# Altium PCB PCB.PcbDoc
Units mm, origin at the board's own origin, x right, y up, seen from the top; angles counter-clockwise.
Board outline 53.85 x 86.11 mm, 2 copper layers (Top Layer, Bottom Layer); 72 components, 42 nets, 242 pads, 64 vias.
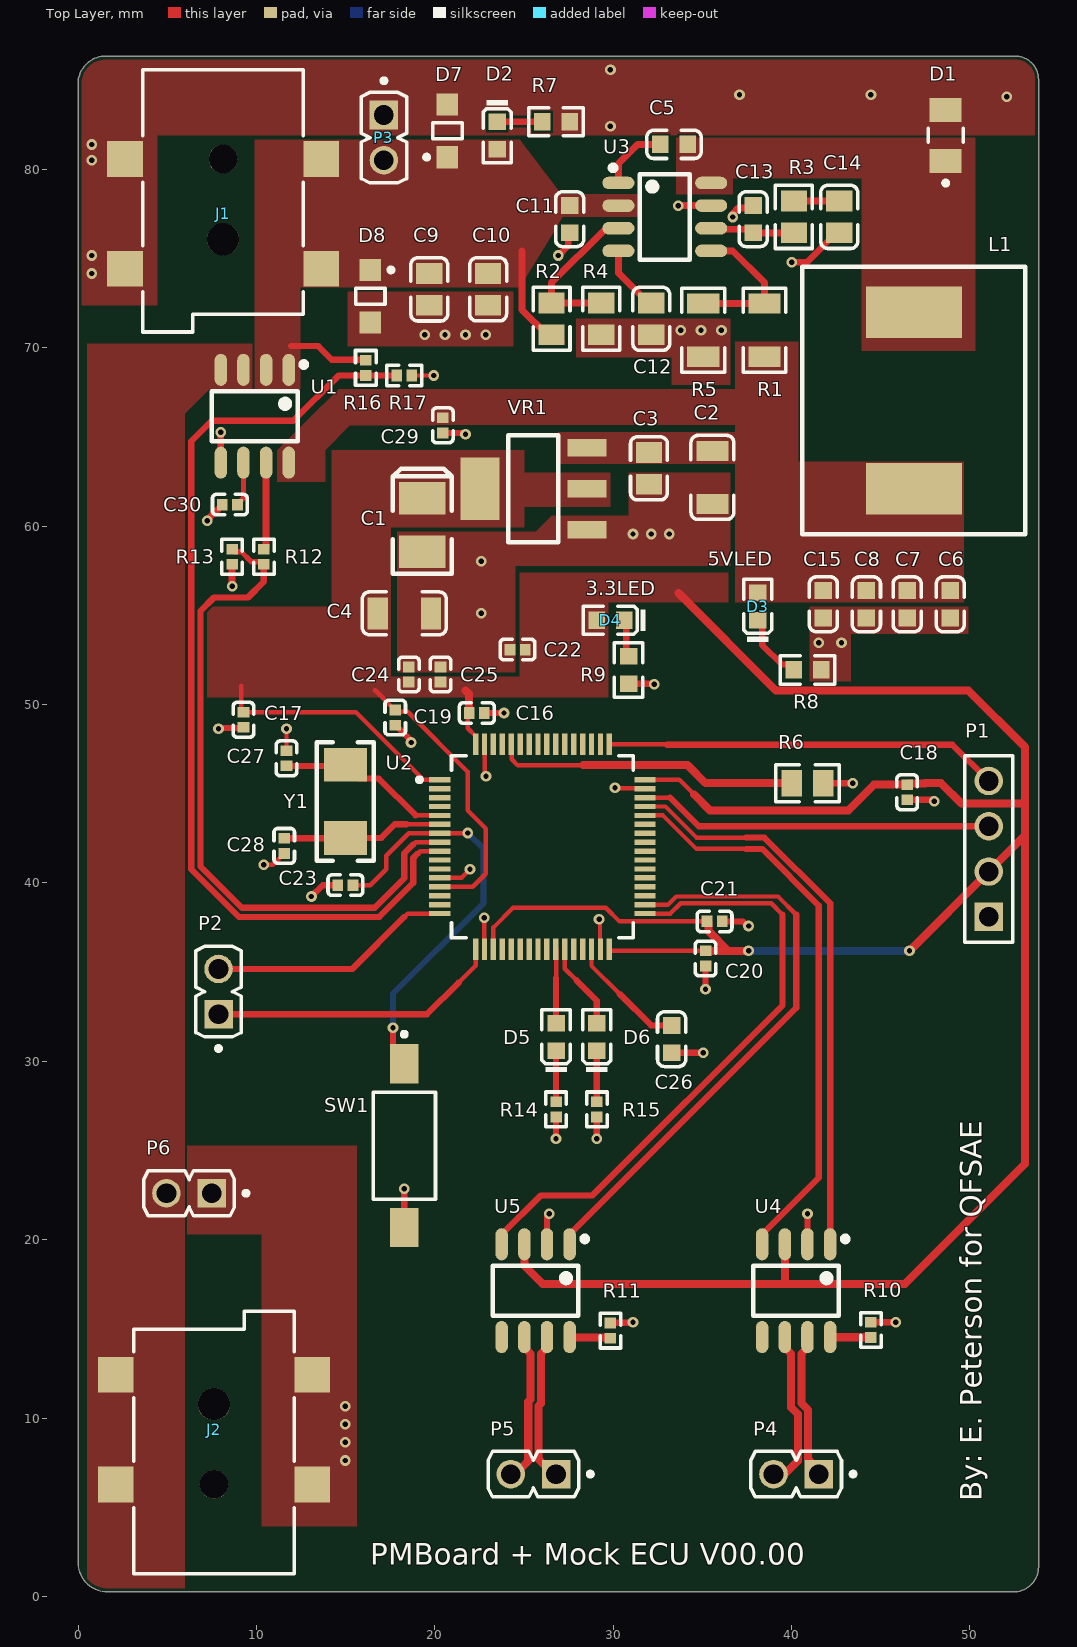
[diagram p0: Top Layer view]
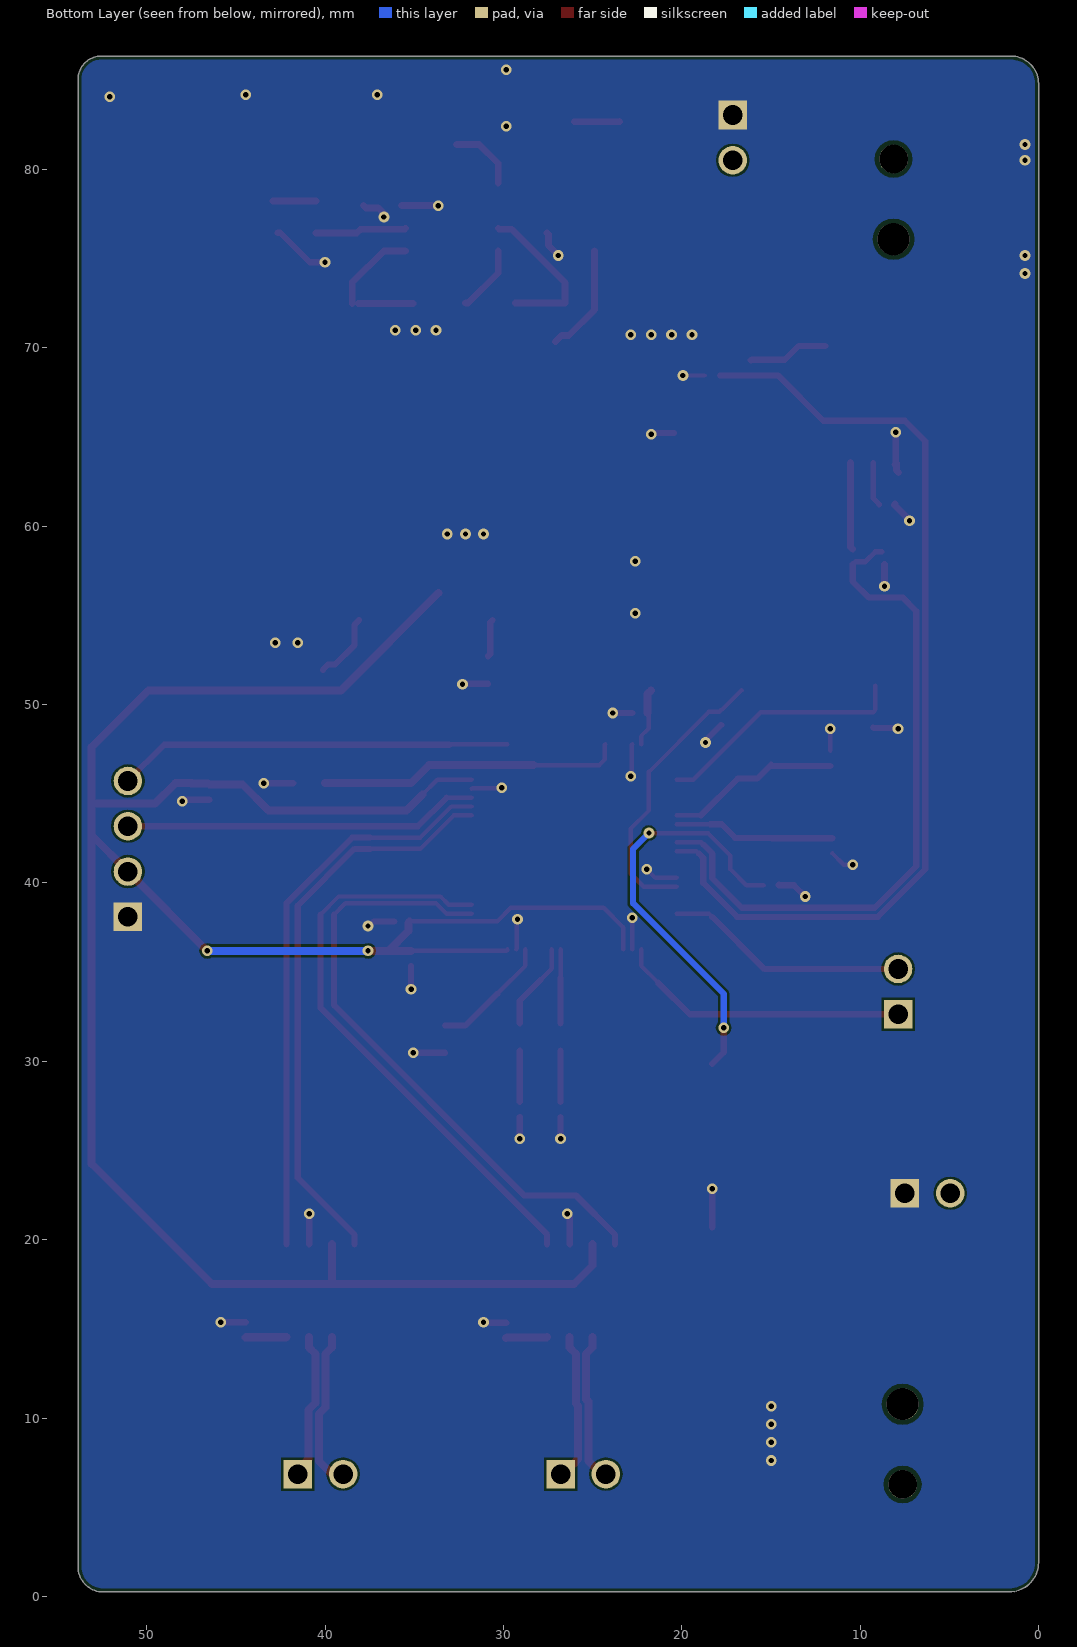
[diagram p1: Bottom Layer view, seen from below]
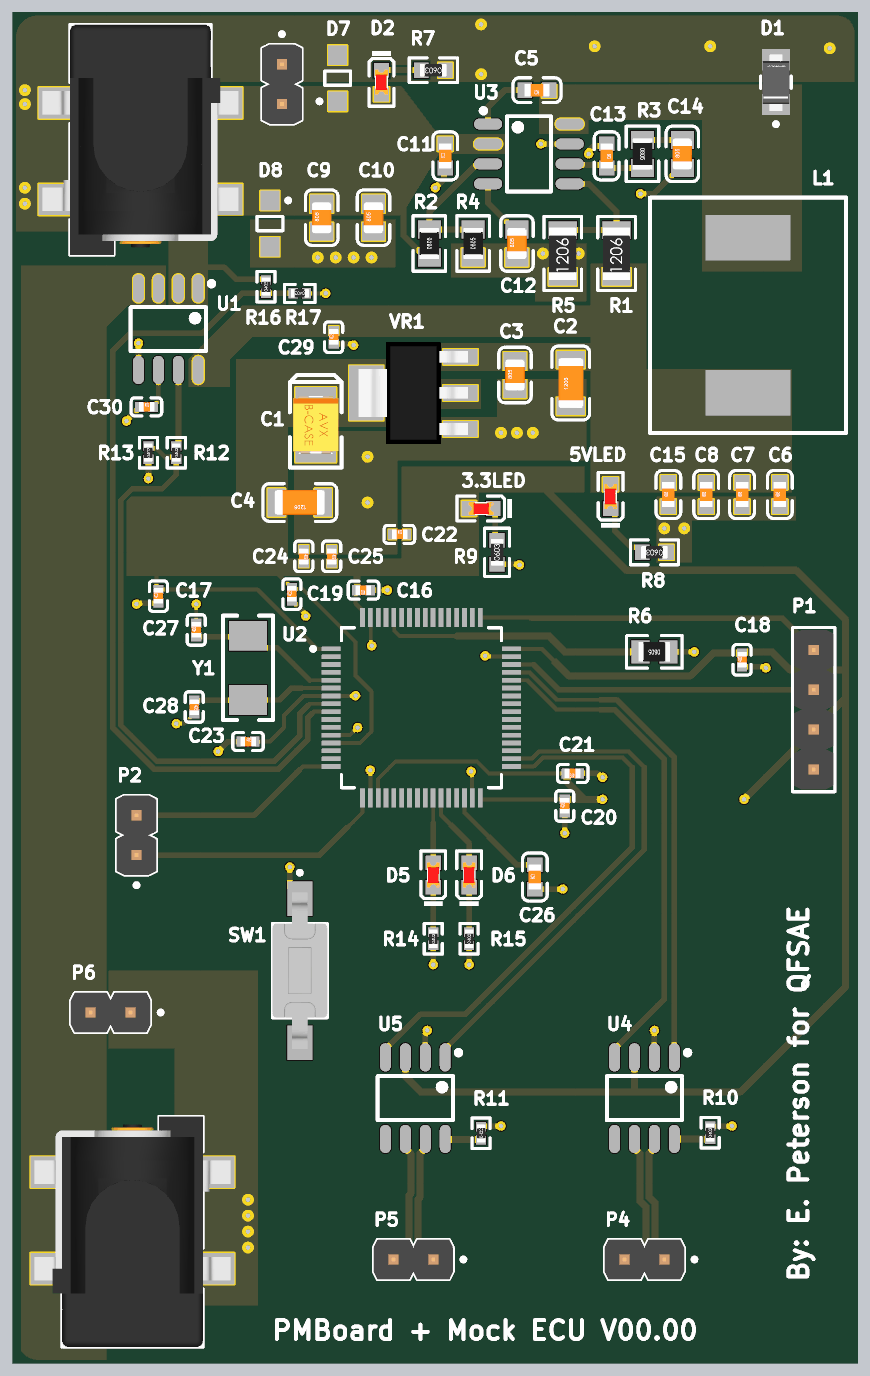
[diagram p2: 3D render of the assembled board from above, using the file's embedded part models]

## Layer stack, top to bottom
Top Solder: solder mask 0.0102, Solder Resist, Dk 3.5
Top Layer: signal copper 0.0356
Dielectric 1: dielectric 0.32, FR-4, Dk 4.8
Bottom Layer: signal copper 0.0356
Bottom Solder: solder mask 0.0102, Solder Resist, Dk 3.5

## Board outline
1.646,0.254 52.446,0.254 ccw(c52.446,1.656) 53.848,1.656 53.848,85.052 ccw(c52.54,85.052) 52.54,86.36 1.552,86.36 ccw(c1.552,84.808) 0,84.808 0,1.9 ccw(c1.646,1.9)

## Design rules (kind name [scope] priority, off if disabled: settings)
BoardOutlineClearance [All] p1: gap=0.2 ignorepadtopadclearanceinfootprint=FALSE
Clearance [All] p1: gap=0.127 ignorepadtopadclearanceinfootprint=FALSE except(0.25: Arc-Hole Track-Hole SMDPad-Hole THPad-Hole Via-Hole Fill-Hole Poly-Hole Region-Hole Text-Hole)
ComponentClearance [All] p1: gap=0.127 collisioncheckmode=3 verticalgap=0.127 showdistances=TRUE
DiffPairsRouting [All] p1: maxlimit=0.254 minlimit=0.127 mostfreqgap=0.127 toplayer_minwidth=0.127 toplayer_maxwidth=25.4 toplayer_prefwidth=0.127 bottomlayer_minwidth=0.127 bottomlayer_maxwidth=25.4 bottomlayer_prefwidth=0.127 maxuncoupledlength=12.7
Height [All] p1: minheight=0 maxheight=1816.048 prefheight=12.7
HoleSize [All] p1: absolutevalues=TRUE maxlimit=6.3 minlimit=0.3 maxpercent=80.000 minpercent=20.000
HoleToHoleClearance [All] p1: gap=0.25 allowstackedmicrovias=FALSE
MinimumAnnularRing [All] p1: minimumring=0.076
MinimumSolderMaskSliver [All] p1: minsoldermaskwidth=0
PlaneClearance [All] p1: clearance=0.127
PlaneConnect PlaneConnectPowerPads [InPadClass('PowerPads')] p1: planeconnectstyle=Direct reliefexpansion=0.508 reliefentries=4 reliefconductorwidth=0.254 reliefairgap=0.254
PlaneConnect [All] p2: pad.planeconnectstyle=Relief pad.reliefexpansion=0.3 pad.reliefentries=4 pad.reliefconductorwidth=0.127 pad.reliefairgap=0.127 via.planeconnectstyle=Direct via.reliefexpansion=0.3 via.reliefentries=4 via.reliefconductorwidth=0.127 via.reliefairgap=0.127
PolygonConnect PolygonConnectPowerPads [All vs InNet('GND') or InNet('VCC12V') or InNet('VCC12VOUT') or InNet('PH') or InNet('VCC5VSW') or InNet('VCC3V3')] p1: connectstyle=Direct reliefconductorwidth=0.254 reliefentries=4 polygonreliefangle="90 Angle" airgapwidth=0.254
PolygonConnect [All] p2: thpad.connectstyle=Relief thpad.reliefconductorwidth=0.127 thpad.reliefentries=4 thpad.polygonreliefangle="90 Angle" thpad.airgapwidth=0.127 smdpad.connectstyle=Relief smdpad.reliefconductorwidth=0.127 smdpad.reliefentries=4 smdpad.polygonreliefangle="90 Angle" smdpad.airgapwidth=0.127 via.connectstyle=Direct via.reliefconductorwidth=0.127 via.reliefentries=4 via.polygonreliefangle="90 Angle" via.airgapwidth=0.127
RoutingVias [All] p1: holewidth=0.3 width=0.6 viastyle="Through Hole" minholewidth=0.3 minwidth=0.6 maxholewidth=0.6 maxwidth=6.6
SilkToSilkClearance [All] p1: silktosilkclearance=0
SilkToSolderMaskClearance [IsPad] p1: minsilkscreentomaskgap=0.127 clearancetoexposedcopper=TRUE
SolderMaskExpansion [All] p1: expansion=0.075 istentingtop=FALSE
Width [All] p1: maxlimit=25.4 minlimit=0.127 preferedwidth=0.127 minimp=50.000000 maximp=50.000000 favimp=50.000000
20 further rules are at their usual default settings.

## Classes and differential pairs
component class Power: D2 D3 D4 D7 D8 J1 P3 R7 R8 R9 R16 R17
component class MCU: C16 C17 C18 C19 C20 C21 C22 C23 C24 C25 C26 C27 C28 D5 D6 P1 P2 R6 R14 R15 SW1 U2 Y1
component class LDO: C1 C2 C3 C4 VR1
component class "Current Monitor": C29 C30 J2 P6 R12 R13 U1
component class CAN: P4 P5 R10 R11 U4 U5
component class Buck: C5 C6 C7 C8 C9 C10 C11 C12 C13 C14 C15 D1 L1 R1 R2 R3 R4 R5 U3
differential pair CAN2: +CAN2_P -CAN2_N
differential pair CAN1: +CAN1_P -CAN1_N

## Components (designator, comment, footprint, x,y, rotation, side; value= is the part's Value field where it differs from the comment)
C1 "100uF" CASE-B_3528 19.304,60.071 r90 top
C2 "10uF" 1206_C 35.56,62.738 r90 top
C3 "100nF" 0805_C 32.004,63.246 r90 top
C4 "100nF" 1206_C 18.288,55.118 r180 top
C5 "100nF" 0603_C 33.409,81.407 r180 top
C6 "10uF" 0603_C 48.895,55.626 r90 top
C7 "10uF" 0603_C 46.482,55.626 r90 top
C8 "10uF" 0603_C 44.196,55.626 r90 top
C9 "10uF" 0805_C 19.685,73.279 r90 top
C10 "10uF" 0805_C 22.987,73.28 r90 top
C11 "100nF" 0603_C 27.559,77.216 r90 top
C12 "0805 8.2nF 50V" 0805_C 32.131,71.628 r90 top
C13 "10pF" 0603_C 37.846,77.216 r270 top
C14 "0805 5.6nF 50V" 0805_C 42.672,77.343 r90 top
C15 "100nF" 0603_C 41.783,55.626 r90 top
C16 "100nF" 0402_C 22.352,49.53 r180 top
C17 "100nF" 0402_C 9.271,49.149 r90 top
C18 "100nF" 0402_C 46.482,45.085 r90 top
C19 "100nF" 0402_C 17.78,49.276 r90 top
C20 "100nF" 0402_C 35.179,35.77 r90 top
C21 "100nF" 0402_C 35.687,37.846 r180 top
C22 "4.7uF" 0402_C 24.638,53.086 r0 top
C23 "100nF" 0402_C 14.986,39.878 r0 top
C24 "1.0uF" 0402_C 18.542,51.689 r270 top
C25 "1.0uF" 0402_C 20.32,51.689 r270 top
C26 "2.2uF" 0603_C 33.274,31.242 r90 top
C27 "30pF" 0402_C 11.684,46.99 r90 top
C28 "30pF" 0402_C 11.557,42.081 r270 top
C29 "100nF" 0402_C 20.447,65.659 r90 top
C30 "1nF" 0402_C 8.509,61.214 r0 top
D1 "SS14FL" FP-425AD-MFG 48.641,81.915 r90 top value=60pF
D2 "0603 Green" 0603_LED_S1 23.495,81.915 r270 top
D3 "0603 Red" 0603_LED_S1 38.1,55.499 r90 top
D4 "0603 Blue" 0603_LED_S1 29.845,54.737 r180 top
D5 "0603 Blue" 0603_LED_S1 26.797,31.369 r90 top
D6 "0603 Blue" 0603_LED_S1 29.083,31.369 r90 top
D7 "SMF15AT1G" ONSC-SOD-123FL-2-498_V 20.701,82.169 r90 top
D8 "SMF15AT1G" ONSC-SOD-123FL-2-498_V 16.383,72.898 r270 top
J1 "694108106102" 694108106102 8.128,78.74 r180 top
J2 "694108106102" 694108106102 7.62,8.128 r0 top
L1 "22 uH" 470 46.863,67.056 r270 top
P1 "61300411121" 61300411121 51.054,41.91 r90 top
P2 "613 002 111 21" WE-61300211121_V 7.874,33.909 r90 top
P3 "613 002 111 21" WE-61300211121_V 17.145,81.788 r270 top
P4 "613 002 111 21" WE-61300211121_V 40.259,6.858 r180 top
P5 "613 002 111 21" WE-61300211121_V 25.527,6.858 r180 top
P6 "613 002 111 21" WE-61300211121_V 6.223,22.606 r180 top
R1 "10.2k 1%" 1206_R 38.481,70.993 r90 top
R2 "100KΩ ±1%" 0805_R 26.543,71.628 r90 top
R3 "6.49k 1%" 0805_R 40.132,77.343 r270 top
R4 "39KΩ ±1%" 0805_R 29.337,71.628 r90 top
R5 "1.96k 1%" 1206_R 35.052,70.993 r90 top
R6 "10KΩ ±1%" 0805_R 40.894,45.593 r180 top
R7 "1.8KΩ ±1%" 0603_R 26.797,82.677 r180 top
R8 "330Ω ±1%" 0603_R 40.894,51.943 r180 top
R9 "220Ω ±1%" 0603_R 30.861,51.943 r90 top
R10 "10KΩ ±1%" 0402_R#1 44.45,14.942 r90 top
R11 "10KΩ ±1%" 0402_R#1 29.845,14.903 r90 top
R12 "100KΩ ±1%" 0402_R#2 10.414,58.293 r90 top
R13 "150KΩ ±1%" 0402_R#2 8.636,58.293 r90 top
R14 "220Ω ±1%" 0402_R#1 26.797,27.305 r90 top
R15 "220Ω ±1%" 0402_R#1 29.083,27.305 r90 top
R16 "300KΩ ±1%" 0402_R#1 16.129,68.878 r90 top
R17 "100KΩ ±1%" 0402_R#1 18.288,68.453 r180 top
SW1 "FSMSM" TECO-FSMSM-2_V 18.288,25.273 r270 top
U1 "ACS712ELCTR-20A-T" SOIC-8_150mil 9.906,66.167 r180 top
U2 "STM32F446RET6" FP-LQFP64-5W-MFG 26.035,42.037 r0 top
U3 "TPS54331DR" SOIC-8_150mil 32.893,77.343 r270 top
U4 "CAN/SN65HVD230DR" SOIC-8_150mil 40.259,17.145 r180 top
U5 "CAN/SN65HVD230DR" SOIC-8_150mil 25.654,17.145 r180 top
VR1 "AMS1117-3.3" SOT-223 25.527,62.103 r0 top
Y1 "8MHz ±20ppm 20pF" SMD-5032_2P 14.986,44.577 r90 top

## Footprints (in the part's own frame and the unit in brackets; to place one, negate y for a bottom-side part, rotate by r counter-clockwise, add the part's x,y. Pads: shape width x height; smd on the part's side, far side on the other; paste and mask are expansions set on the pad)
0402_C [mm]
  rect 0.6x0.65 smd mask+0.051: 1(-0.425,0) 2(0.425,0)
  silkscreen extent -0.97,-0.58 0.97,0.58, body extent -0.48,-0.3 0.52,0.3, height 0.2
0402_R#1 [mm]
  rect 0.6x0.65 smd mask+0.051: 1(-0.425,0) 2(0.425,0)
  silkscreen extent -0.97,-0.58 0.97,0.58, body extent -0.57,-0.27 0.58,0.28, height 0.41
0402_R#2 [mm]
  rect 0.6x0.65 smd: 1(-0.425,0) 2(0.425,0)
  silkscreen extent -0.97,-0.58 0.97,0.58, body extent -0.57,-0.27 0.58,0.28, height 0.41
470 [mm]
  rect 2.9x5.4 smd mask+0: 1(-4.95,0) 2(4.95,0)
  silkscreen extent -7.5,-6.25 7.51,6.25
0603_C [mm]
  rect 0.93x0.98 smd: 1(-0.77,0) 2(0.77,0)
  silkscreen extent -1.53,-0.79 1.54,0.79, body extent -0.8,-0.4 0.8,0.4, height 0.3
0603_LED_S1 [mm]
  rect 0.93x0.98 smd: A(0.77,0) K(-0.77,0)
  silkscreen extent -1.98,-0.79 1.54,0.79, body extent -0.8,-0.4 0.8,0.4, height 0.6
0603_R [mm]
  rect 0.93x0.98 smd: 1(-0.77,0) 2(0.77,0)
  silkscreen extent -1.53,-0.79 1.54,0.79, body extent -0.85,-0.4 0.85,0.4, height 0.56
0805_C [mm]
  rect 1.16x1.47 smd: 1(-0.89,0) 2(0.89,0)
  silkscreen extent -1.77,-1.04 1.77,1.04, body extent -1,-0.62 1,0.63, height 0.77
0805_R [mm]
  rect 1.16x1.47 smd: 1(-0.89,0) 2(0.89,0)
  silkscreen extent -1.77,-1.04 1.77,1.03, body extent -1,-0.62 1,0.63, height 0.49
1206_C [mm]
  rect 1.13x1.8 smd: 1(-1.49,0) 2(1.49,0)
  silkscreen extent -2.36,-1.2 2.35,1.2, body extent -1.6,-0.81 1.6,0.79, height 1
1206_R [mm]
  rect 1.13x1.8 smd: 1(-1.49,0) 2(1.49,0)
  silkscreen extent -2.36,-1.2 2.35,1.2, body extent -1.7,-0.86 1.65,0.87, height 0.85
61300411121 [mm] "Pin Header, pitch 2.54 mm, THT, Vertical, single row, 4p"
  rect 1.6x1.6 hole 1.1: 1(-3.81,0)
  round 1.6 hole 1.1: 2(-1.27,0) 3(1.27,0) 4(3.81,0)
  silkscreen extent -5.23,-1.35 5.23,1.35, body extent -5.08,-1.27 5.08,1.27, height 8.57
694108106102 [mm] "DC Power Jack Right Angled SMT ?6.4 with 4 soldering pads & pegs"
  rect 2x2 smd: 1(-5.5,4.3) 1(-5.5,-1.85) 2(5.5,-1.85) 3(5.5,4.3)
  round 1.6 hole 1.6 unplated: MH1(0,-1.85)
  round 1.8 hole 1.8 unplated: MH2(0,2.65)
  silkscreen extent -4.5,-6.85 4.5,7.85, body extent -6.25,-6.85 6.25,7.85, height 11.05
CASE-B_3528 [mm]
  rect 1.8x2.6 smd: 1(1.5,0) 2(-1.5,0)
  silkscreen extent -2.73,-1.65 3.16,1.65, body extent -1.85,-1.47 1.85,1.46, height 2.03
FP-425AD-MFG [mm]
  rect 1.34x1.8 smd paste+0 mask+0: 1(-1.43,0) 2(1.43,0)
  silkscreen extent -2.8,-0.97 0.39,0.97, body extent -2.2,-1.07 2.2,1.07, height 0.25
FP-LQFP64-5W-MFG [mm]
  rect 1.2x0.3 smd paste+0 mask+0: 1(-5.75,3.75) 2(-5.75,3.25) 3(-5.75,2.75) 4(-5.75,2.25) 5(-5.75,1.75) 6(-5.75,1.25) 7(-5.75,0.75) 8(-5.75,0.25) 9(-5.75,-0.25) 10(-5.75,-0.75) 11(-5.75,-1.25) 12(-5.75,-1.75) 13(-5.75,-2.25) 14(-5.75,-2.75) 15(-5.75,-3.25) 16(-5.75,-3.75) 33(5.75,-3.75) 34(5.75,-3.25) 35(5.75,-2.75) 36(5.75,-2.25) 37(5.75,-1.75) 38(5.75,-1.25) 39(5.75,-0.75) 40(5.75,-0.25) 41(5.75,0.25) 42(5.75,0.75) 43(5.75,1.25) 44(5.75,1.75) 45(5.75,2.25) 46(5.75,2.75) 47(5.75,3.25) 48(5.75,3.75)
  rect 0.3x1.2 smd paste+0 mask+0: 17(-3.75,-5.75) 18(-3.25,-5.75) 19(-2.75,-5.75) 20(-2.25,-5.75) 21(-1.75,-5.75) 22(-1.25,-5.75) 23(-0.75,-5.75) 24(-0.25,-5.75) 25(0.25,-5.75) 26(0.75,-5.75) 27(1.25,-5.75) 28(1.75,-5.75) 29(2.25,-5.75) 30(2.75,-5.75) 31(3.25,-5.75) 32(3.75,-5.75) 49(3.75,5.75) 50(3.25,5.75) 51(2.75,5.75) 52(2.25,5.75) 53(1.75,5.75) 54(1.25,5.75) 55(0.75,5.75) 56(0.25,5.75) 57(-0.25,5.75) 58(-0.75,5.75) 59(-1.25,5.75) 60(-1.75,5.75) 61(-2.25,5.75) 62(-2.75,5.75) 63(-3.25,5.75) 64(-3.75,5.75)
  silkscreen extent -7.02,-5.1 5.1,5.1
ONSC-SOD-123FL-2-498_V [mm] "SOD, 2-Leads, Body 2.7x1.65mm"
  rect 1.25x1.22 smd: 1(-1.475,0) 2(1.475,0)
  silkscreen extent -1.6,-0.82 0.45,1.28, body extent -1.35,-0.82 1.35,0.82, height 0.98
SMD-5032_2P [mm]
  rect 1.9x2.4 smd: 1(-2.05,0) 2(2.05,0)
  silkscreen extent -3.32,-1.6 3.32,1.6
SOIC-8_150mil [mm]
  oval 0.7x1.8 smd: 1(-1.905,-2.6) 2(-0.635,-2.6) 3(0.635,-2.6) 4(1.905,-2.6) 5(1.905,2.6) 6(0.635,2.6) 7(-0.635,2.6) 8(-1.905,2.6)
  silkscreen extent -2.9,-3.05 2.4,1.4
SOT-223 [mm]
  rect 2.2x1 smd: 1(3,-2.3) 2(3,0) 3(3,2.3)
  rect 2.2x3.5 smd: 2(-3,0)
  silkscreen extent -1.4,-3 1.4,3, body extent -3.49,-3.24 3.49,3.24, height 1.64
TECO-FSMSM-2_V [mm] "SMD, 2-Leads, Body 6x3.5mm, Pitch 9.19mm"
  rect 2.2x1.6 smd: 1(-4.595,0)
  rect 2.18x1.6 smd: 2(4.595,0)
  silkscreen extent -6.37,-1.75 3,1.75, body extent -4.98,-1.75 4.98,1.75, height 4.4
WE-61300211121_V [mm] "Header, 2-Leads, Body 5.08x2.54mm, Pitch 2.54mm"
  rect 1.6x1.6 hole 1.1: 1(-1.27,0)
  round 1.6 hole 1.1: 2(1.27,0)
  silkscreen extent -3.31,-1.27 2.54,1.27, body extent -2.54,-1.27 2.54,1.27, height 8.54

## Part data
C1: library part "3528 100uF (107) 10% 6.3V", "Tantalum capacitor", Manufacturer=AVX, Package=3528, PartNumber=TAJB107K006RNJ, SuppliersPartNumber=C16133, Tolerance=10%, Voltage=6.3V, Capacitance=100uF, ComponentLink1Description="Supplier link", ComponentLink1URL=http://www.szlcsc.com/product/details_16815.html, Supplier=LC
C2: library part "1206 10uF (106) 10% 50V", "Chip capacitors", Manufacturer="Samsung Electro-Mechanics", Package=1206, PartNumber=CL31A106KBHNNNE, SuppliersPartNumber=C13585, Tolerance=10%, Voltage=50V, Capacitance=10uF, ComponentLink1Description="Supplier link", ComponentLink1URL=http://www.szlcsc.com/product/details_14236.html, Supplier=LC
C3: library part "0805 100nF(104) 10% 50V", "Chip capacitors", Manufacturer=YAGEO, Package=0805, PartNumber=CC0805KRX7R9BB104, SuppliersPartNumber=C49678, Tolerance=10%, Voltage=50V, Capacitance=100nF, ComponentLink1Description="Supplier link", ComponentLink1URL=http://www.szlcsc.com/product/details_50686.html, Supplier=LC
C4: library part "1206 100nF (104) 10% 50V", "Chip capacitors", Manufacturer="Samsung Electro-Mechanics", Package=1206, PartNumber=CL31B104KBCNNNC, SuppliersPartNumber=C24497, Tolerance=10%, Voltage=50V, Capacitance=100nF, ComponentLink1Description="Supplier link", ComponentLink1URL=http://www.szlcsc.com/product/details_25237.html, Supplier=LC
C5 C11 C15: library part "0603 100nF (104) 10% 50V", "Chip capacitors", Manufacturer=YAGEO, Package=0603, PartNumber=CC0603KRX7R9BB104, SuppliersPartNumber=C14663, Tolerance=10%, Voltage=50V, Capacitance=100nF, ComponentLink1Description="Supplier link", ComponentLink1URL=http://www.szlcsc.com/product/details_15331.html, Supplier=LC
C6 C7 C8: library part "0603 10uF (106) 10% 10V", "Chip capacitors", Manufacturer="Samsung Electro-Mechanics", Package=0603, PartNumber=CL10A106KP8NNNC, SuppliersPartNumber=C19702, Tolerance=10%, Voltage=10V, Capacitance=10uF, ComponentLink1Description="Supplier link", ComponentLink1URL=http://www.szlcsc.com/product/details_20411.html, Supplier=LC
C9 C10: library part "0805 10uF (106) 10% 25V", "Chip capacitors", Manufacturer="Samsung Electro-Mechanics", Package=0805, PartNumber=CL21A106KAYNNNE, SuppliersPartNumber=C15850, Tolerance=10%, Voltage=25V, Capacitance=10uF, ComponentLink1Description="Supplier link", ComponentLink1URL=http://www.szlcsc.com/product/details_16532.html, Supplier=LC
C12: LCSC=C170117, PartNumber=CL21B822KBANNNC
C13: library part "0603 10pF (100) 5% 50V", "Chip capacitors", Manufacturer="Samsung Electro-Mechanics", Package=0603, PartNumber=CL10C100JB8NNNC, SuppliersPartNumber=C1634, Tolerance=5%, Voltage=50V, Capacitance=10pF, ComponentLink1Description="Supplier link", ComponentLink1URL=http://www.szlcsc.com/product/details_1986.html, Supplier=LC
C14: LCSC=C153719, PartNumber=CL21B562KBANNNC
C16 C17 C18 C19 C20 C21 C23 C29: library part "0402 100nF (104) 10% 16V", "Chip capacitors", Manufacturer="Samsung Electro-Mechanics", Package=0402, PartNumber=CL05B104KO5NNNC, SuppliersPartNumber=C1525, Tolerance=10%, Voltage=16V, Capacitance=100nF, ComponentLink1Description="Supplier link", ComponentLink1URL=http://www.szlcsc.com/product/details_1877.html, Supplier=LC
C22: library part "0402 4.7uF (475) 20% 10V", "Chip capacitor", Manufacturer="Samsung Electro-Mechanics", Package=0402, PartNumber=CL05A475MP5NRNC, SuppliersPartNumber=C23733, Tolerance=20%, Voltage=10V, Capacitance=4.7uF, ComponentLink1Description="Supplier link", ComponentLink1URL=http://www.szlcsc.com/product/details_24469.html, Supplier=LC
C24 C25: library part "0402 1.0uF (105) 10% 25V", "Chip capacitor", Capacitance=1uF, Manufacturer="Samsung Electro-Mechanics", Package=0402, PartNumber=CL05A105KA5NQNC, SuppliersPartNumber=C52923, Tolerance=10%, Voltage=25V, ComponentLink1Description="Supplier link", ComponentLink1URL=http://www.szlcsc.com/product/details_53938.html, Supplier=LC
C26: library part "0603 2.2uF (225) 10% 16V", "Chip capacitors", Manufacturer="Samsung Electro-Mechanics", Package=0603, PartNumber=CL10A225KO8NNNC, SuppliersPartNumber=C23630, Tolerance=10%, Voltage=16V, Capacitance=2.2uF, ComponentLink1Description="Supplier link", ComponentLink1URL=http://www.szlcsc.com/product/details_24366.html, Supplier=LC
C27 C28: library part "0402 30pF (300) 5% 50V", "Chip capacitors", Manufacturer="Guangdong Fenghua Advanced Tech", Package=0402, PartNumber=0402CG300J500NT, SuppliersPartNumber=C1570, Tolerance=5%, Voltage=50V, Capacitance=30pF, ComponentLink1Description="Supplier link", ComponentLink1URL=http://www.szlcsc.com/product/details_1922.html, Supplier=LC
C30: library part "0402 1nF (102) 10% 50V", "Chip capacitor", Manufacturer="Guangdong Fenghua Advanced Tech", Package=0402, PartNumber=0402B102K500NT, SuppliersPartNumber=C1523, Tolerance=10%, Voltage=50V, Capacitance=1nF, ComponentLink1Description="Supplier link", ComponentLink1URL=http://www.szlcsc.com/product/details_1875.html, Supplier=LC
D1: library part CMP-07162-000013-1, "DIODE SCHOTTKY 40V 1A SOD123F", Capacitance=60pF, Forward Current=1A, Manufacturer="ON Semiconductor", Max Junction Temp=+125°C, Max Repetitive Reverse Voltage=40V, Max Surge Forward Current=40A, Package=425AD, Peak Reverse Current=30uA, Temperature="-55°C to +125°C", Temperature Range Low=-55°C, Automotive=No, Category=Diode, ComponentLink2Description=Datasheet, ComponentLink2URL=https://www.onsemi.com/pub/Collateral/SS14FL-D.PDF, Device Class L1="Discrete Semiconductors", Device Class L2=Diodes, Device Class L3="Schottky Diodes", Digikey Description="DIODE SCHOTTKY 40V 1A SOD123F", Height=1.08mm, Lead Free=Yes, Manufacturer Part Number=SS14FL, Mouser Description="SS14FL Series 40 V 1 A Surface Mount Schottky Barrier Rectifier - SOD-123F", Octopart=https://octopart.com/ss14fl-on+semiconductor-84331601, Reverse Voltage=40V, RoHS=TRUE, Temperature Range High=+125°C
D2: library part "0603 LED Green", "LED", Color=Green, Package=0603, SuppliersPartNumber=C72043, ComponentLink1Description=供应商链接, ComponentLink1URL=http://www.szlcsc.com/product/details_73152.html, Supplier=LC
D3: library part "0603 LED Red", "LED", Color=Red, Package=0603, SuppliersPartNumber=C2286, ComponentLink1Description=供应商链接, ComponentLink1URL=http://www.szlcsc.com/product/details_2659.html, Supplier=LC
D4 D5 D6: library part "0603 LED Blue", "LED", Color=Blue, Package=0603, SuppliersPartNumber=C72041, ComponentLink1Description=供应商链接, ComponentLink1URL=http://www.szlcsc.com/product/details_73150.html, Supplier=LC
D7 D8: library part CMP-1061-00616-1, "200 W Transient Voltage Suppressor, 2-Pin SOD-123FL, Pb-Free, Tape and Reel", Manufacturer="On Semiconductor", ComponentLink1Description="Manufacturer URL", ComponentLink1URL=http://www.onsemi.com/, ComponentLink2Description=Datasheet, ComponentLink2URL=http://www.onsemi.com/pub_link/Collateral/SMF5.0AT1-D.PDF, ComponentLink3Description="Package Specification", ComponentLink3URL=http://www.onsemi.com/pub_link/Collateral/498-01.PDF, DatasheetVersion="Rev. 7", Direction=Unidirectional, IR Max (uA)=1, Mounting Technology="Surface Mount", PackageDescription="2-Pin SOD, Body 1.65 x 2.7 mm", PackageReference=SOD-123FL-2-498, PackageVersion="Rev. D, 05/2013", Packing="Tape and Reel", PartNumber=SMF15AT1G, RoHS=Pb-Free, V(BR) Typ (V)=17.6
J1 J2: library part CMP-1502-00180-1, "DC Power Jack Connector with 4 soldering pads & Pegs WR-DC, Male, Right Angled, SMT, 5 A, 24 V", Manufacturer="Wurth Elektronik", Operating Temperature=-40to85degC, Rated Current=5A, Working Voltage=24V, Datasheet URL=http://katalog.we-online.de/em/datasheet/6941xx106102.pdf, Gender=Male, Manufacturer URL=http://www.we-online.de, Mounting Technology=SMT, Opening Diameter=6.4mm, Orientation=RightAngled, Package Reference=694108106102, Packaging=TapeandReel, Part Number=694108106102, Plug Inner Diameter=2.55mm, Plug Outer Diameter=5.5mm, Publisher=WurthElektronik
L1: library part SRP6540-5R6M
P1: library part CMP-1502-01064-1, "THT Vertical Pin Header WR-PHD, Pitch 2.54 mm, Single Row, 4 pins", Contact Resistance=20mOhm, Manufacturer="Wurth Elektronik", Operating Temperature=-40to105degC, Rated Current=3A, Withstanding Voltage=500VAC, Working Voltage=250VAC, Datasheet URL=https://katalog.we-online.de/em/datasheet/6130xx11121.pdf, Gender=Male, Manufacturer URL=http://www.we-online.de, Mounting Technology=THT, Orientation=Vertical, Package Reference=61300411121, Packaging=Bag, Part Number=61300411121, Pin Number=4, Pitch=2.54mm, Publisher=WurthElektronik, Row Number=Single
P2 P3 P4 P5 P6: library part CMP-1712-00002-3, "Male Header, Pitch 2.54 mm, 1 x 2 Position, Height 8.54 mm, Tail Length 3 mm, -40 to 105 degC, RoHS, Bulk", Max Operating Temperature="125 degC", Min Operating Temperature="-40 degC", ComponentLink1Description="Manufacturer URL", ComponentLink1URL=https://www.we-online.com/, ComponentLink2Description=Datasheet, ComponentLink2URL=http://katalog.we-online.de/em/datasheet/6130xx11121.pdf, DatasheetVersion="Rev. J", Mount="Through Hole", Mounting Technology="Through Hole", PackageDescription="Male Header, Pitch 2.54 mm, 1 x 2 Position, Height 8.54 mm, Tail Length 3 mm", Packaging=Bulk, PartNumber="613 002 111 21", Pins=2, REACH SVHC="No SVHC", RoHSCompliant=True
R1: library part "1206 10.2k 1%", LCSC=C247410, PartNumber=1206W4F1022T5E
R2: library part "0805 100K (1003) 1%", "Chip resistor", Manufacturer="Uniroyal Elec", Package=0805, Power=1/8W, SuppliersPartNumber=C17407, Tolerance=1%, ComponentLink1Description="Supplier link", ComponentLink1URL=http://www.szlcsc.com/product/details_18095.html, Supplier=LC
R3: library part "0805 6.49k 1%", LCSC=C17769, PartNumber=0805W8F6491T5E
R4: library part "0805 39K (3902) 1%", "Chip resistor", Manufacturer="Uniroyal Elec", Package=0805, Power=1/8W, SuppliersPartNumber=C25826, Tolerance=1%, ComponentLink1Description="Supplier link", ComponentLink1URL=http://www.szlcsc.com/product/details_26569.html, Supplier=LC
R5: library part "1206 1.96k 1%", LCSC=C247410, PartNumber=1206W4F1022T5E
R6: library part "0805 10K (1002) 1%", "Chip resistor", Manufacturer="Uniroyal Elec", Package=0805, Power=1/8W, SuppliersPartNumber=C17414, Tolerance=1%, ComponentLink1Description="Supplier link", ComponentLink1URL=http://www.szlcsc.com/product/details_18102.html, Supplier=LC
R7: library part "0603 1.8K (1801) 1%", "Chip resistor", Manufacturer="Uniroyal Elec", Package=0603, PartNumber=0603WAF1801T5E, Power=1/10W, Resistance=1.8KΩ, SuppliersPartNumber=C4177, Tolerance=1%, ComponentLink1Description="Supplier link", ComponentLink1URL=http://www.szlcsc.com/product/details_4584.html, Supplier=LC
R8: library part "0603 330R (3300) 1%", "Chip resistor", Manufacturer="Uniroyal Elec", Package=0603, PartNumber=0603WAF3300T5E, Power=1/10W, Resistance=330Ω, SuppliersPartNumber=C23138, Tolerance=1%, ComponentLink1Description="Supplier link", ComponentLink1URL=http://www.szlcsc.com/product/details_23865.html, Supplier=LC
R9: library part "0603 220R (2200) 1%", "Chip resistor", Manufacturer="Uniroyal Elec", Package=0603, PartNumber=0603WAF2200T5E, Power=1/10W, Resistance=220Ω, SuppliersPartNumber=C22962, Tolerance=1%, ComponentLink1Description="Supplier link", ComponentLink1URL=http://www.szlcsc.com/product/details_23689.html, Supplier=LC
R10 R11: library part "0402 10K (1002) 1%", "Chip resistor", Manufacturer="Uniroyal Elec", Package=0402, PartNumber=0402WGF1002TCE, Power=1/16W, Resistance=10KΩ, SuppliersPartNumber=C25744, Tolerance=1%, ComponentLink1Description="Supplier link", ComponentLink1URL=http://www.szlcsc.com/product/details_26487.html, Supplier=LC
R12 R17: library part "0402 100K (1003) 1%", "Chip resistor", Manufacturer="Uniroyal Elec", Package=0402, PartNumber=0402WGF1003TCE, Power=1/16W, Resistance=100KΩ, SuppliersPartNumber=C25741, Tolerance=1%, ComponentLink1Description="Supplier link", ComponentLink1URL=http://www.szlcsc.com/product/details_26484.html, Supplier=LC
R13: library part "0402 150K (1503) 1%", "Chip resistor", Manufacturer="Uniroyal Elec", Package=0402, PartNumber=0402WGF1503TCE, Power=1/16W, Resistance=150KΩ, SuppliersPartNumber=C25755, Tolerance=1%, ComponentLink1Description="Supplier link", ComponentLink1URL=http://www.szlcsc.com/product/details_26498.html, Supplier=LC
R14 R15: library part "0402 220R (2200) 1%", "Chip resistor", Manufacturer="Uniroyal Elec", Package=0402, PartNumber=0402WGF2200TCE, Power=1/16W, Resistance=220Ω, SuppliersPartNumber=C25091, Tolerance=1%, ComponentLink1Description="Supplier link", ComponentLink1URL=http://www.szlcsc.com/product/details_25834.html, Supplier=LC
R16: library part "0402 300K (3003) 1%", "Chip resistor", Manufacturer="Uniroyal Elec", Package=0402, PartNumber=0402WGF3003TCE, Power=1/16W, Resistance=300KΩ, SuppliersPartNumber=C25774, Tolerance=1%, ComponentLink1Description="Supplier link", ComponentLink1URL=http://www.szlcsc.com/product/details_26517.html, Supplier=LC
SW1: library part CMP-2000-07511-1, "FSMSM Push Button Switch, 50 mA, -35 to 85 degC, 2-Pin SMD, RoHS, Bulk", Case\/Package=SMD/SMT, Contact Current Rating=50mA, Contact Resistance=100mOhm, Manufacturer="TE Connectivity", Max Operating Temperature=85degC, Max Voltage Rating (DC)=12V, Min Operating Temperature=-35degC, Operating Force=180gf, Package Description="2-Pin Surface Mount Device, Body 6 x 3.5 mm, Pitch 9.19 mm", Package Quantity=1000, Voltage Rating (DC)=24V, Actuator Length=1.07mm, Actuator Material=Polyamide, Contact Material=Brass, Contact Plating=Silver, Current Rating=50mA, Datasheet URL=http://www.te.com/commerce/DocumentDelivery/DDEController?Action=showdoc&DocId=Customer+Drawing%7F1437566-3%7FC2%7Fpdf%7FEnglish%7FENG_CD_1437566-3_C2_1437566_3_1_c.dwg.pdf%7F1437566-3, Datasheet Version="Rev. C2, 08/2014", Electrical Life=20000Cycles, ELV=Compliant, Illumination Type=Illuminated, Lead Free=LeadFree, Manufacturer URL=http://www.te.com/, Mechanical Life=20000Cycles, Mount=SurfaceMount, Mounting Technology=SurfaceMount, Orientation=Straight, Package Reference=FSMSM, Packaging=LoosePiece, REACH SVHC=Unknown, RoHSCompliant=true, Switch Travel=0.25mm, Termination=GullWing, Throw Configuration=SPST
U1: library part ACS712ELCTR-20A-T_[C10681], "传感器", Package=SOIC-8_150mil, SuppliersPartNumber=C10681, ComponentLink1Description=供应商链接, ComponentLink1URL=http://www.szlcsc.com/product/details_11225.html, Supplier=LC
U2: library part CMP-12105-000007-1, "IC MCU 32BIT 512KB FLASH 64LQFP", Ambient Temperature Range High=+85°C, Ambient Temperature Range Low=-40°C, Frequency=180MHz, Manufacturer=ST, Max Junction Temp=+105°C, Max Supply Voltage=3.6V, Min Supply Voltage=1.7V, Package=LQFP64-5W, Temperature="-40°C to +105°C", Automotive=No, Category=IC, ComponentLink2Description=Datasheet, ComponentLink2URL=https://www.st.com/en/microcontrollers-microprocessors/stm32f446re.html, Core Architecture="ARM Cortex-M4", Data Bus Width=32bits, Device Class L1="Integrated Circuits (ICs)", Device Class L2="Embedded Processors and Controllers", Device Class L3=Microcontrollers, Digikey Description="IC MCU 32BIT 512KB FLASH 64LQFP", Height=1.6mm, Interface=I2C,SPI,UART,USART,CAN,USB,LIN,IrDA,I2S,Other, Ipc Land Pattern Name=QFP50P1200X1200X160-64, Lead Free=Yes, Manufacturer Part Number=STM32F446RET6, Memory Size=512KBytes, Memory Type=FLASH, Mouser Description="ARM Microcontrollers - MCU High-performance and DSP with FP, ARM Cortex-M4 MCU with 512 Kbytes Flash, 180 MHz CPU, Art Accelerator, SDRAM", Number Of A/D Converters=3, Number Of Adc Channels=16, Number Of Cores=1, Number Of I2C Channels=4, Number Of I/Os=50, Number Of Pwm Channels=32, Number Of Spi Channels=4, Number Of Timers/Counters=14, Number Of Uart Channels=6, Number Of Usb Channels=2, Octopart=https://octopart.com/stm32f446ret6-stmicroelectronics-52642920, Ram Size=128KBytes, RoHS=TRUE, Standoff Height=0.05mm, Temperature Range High=+105°C, Temperature Range Low=-40°C
U3: library part TPS54331DR_[C9865], "DC-DC芯片", Package=SOIC-8_150mil, SuppliersPartNumber=C9865, ComponentLink1Description=供应商链接, ComponentLink1URL=http://www.szlcsc.com/product/details_10397.html, Supplier=LC
U4 U5: library part CAN/SN65HVD230DR_[C12084], "CAN", Package=SOIC-8_150mil, SuppliersPartNumber=C12084, ComponentLink1Description=供应商链接, ComponentLink1URL=http://www.szlcsc.com/product/details_12661.html, Supplier=LC
VR1: library part "SOT-223 AMS1117-3.3", "低压差线性稳压(LDO)", Package=SOT-223, SuppliersPartNumber=C6186, ComponentLink1Description=供应商链接, ComponentLink1URL=http://www.szlcsc.com/product/details_6652.html, Supplier=LC
Y1: library part "SMD-5032_2P 8MHz 20ppm 20pF", "贴片晶振", Package=SMD-5032_2P, SuppliersPartNumber=C115962, ComponentLink1Description=供应商链接, ComponentLink1URL=http://www.szlcsc.com/product/details_117214.html, Supplier=LC

## Via types
v1: diameter 0.6, hole 0.3, Top Layer to Bottom Layer, 64 vias

## Nets (pads, with @x,y where several pads share a name; then routed paths per layer and width w, separated by ;. In a path a pad name is that pad's centre, name@x,y a point inside that pad or via, vN(x,y) a via of type N, cw(c..) or ccw(c..) an arc to the next point about the centre after c; other vN are vias at no path point)
BOOT: C5.2 U3.1 | length 3.9
  Top Layer w0.381: U3.1 30.293,80.331 31.369,81.407 C5.2
BOOT0: R6.2 U2.60 | length 17.1
  Top Layer w0.25: U2.60 24.31,47.762 24.31,46.937 24.638,46.609 28.321,46.609
  Top Layer w0.45: 28.321,46.609 34.163,46.609 35.179,45.593 R6.2
CAN1_N: P4.2 U4.6 | length 8.5
  Top Layer w0.45: P4.2@39.37,6.858 39.62,6.858 40.352,7.59 40.352,10.223 39.971,10.604 39.971,13.606 39.624,13.953 U4.6
CAN1_P: P4.1 U4.7 | length 8.5
  Top Layer w0.45: U4.7 40.894,13.953 40.548,13.606 40.548,10.843 40.929,10.462 40.929,7.697 41.192,7.433 41.335,7.433 P4.1@41.91,6.858
CAN1_RX: U2.44 U4.4 | length 32.1
  Top Layer w0.25: U2.44 32.794,43.787 34.671,41.91 37.465,41.91
  Top Layer w0.35: 37.465,41.91 38.354,41.91 41.529,38.735 41.529,23.47 38.354,20.295 U4.4
CAN1_TX: U2.45 U4.1 | length 31.7
  Top Layer w0.25: U2.45 32.929,44.287 34.671,42.545 37.465,42.545
  Top Layer w0.35: 37.465,42.545 38.481,42.545 42.164,38.862 U4.1
CAN2_N: P5.2 U5.6 | length 8.4
  Top Layer w0.45: P5.2 24.507,6.858 25.239,7.59 25.239,10.926 25.366,11.053 25.366,13.606 25.019,13.953 U5.6
CAN2_P: P5.1 U5.7 | length 8.4
  Top Layer w0.45: U5.7 26.289,13.953 25.943,13.606 25.943,10.814 25.816,10.687 25.816,7.697 26.079,7.433 26.222,7.433 P5.1
CAN2_RX: U2.33 U5.4 | length 34.9
  Top Layer w0.25: U2.33 33.207,38.287 33.782,38.862 38.862,38.862 39.497,38.227
  Top Layer w0.35: U5.4 23.749,20.295 25.933,22.479 28.829,22.479 39.497,33.147 39.497,38.227
CAN2_TX: U2.34 U5.1 | length 32.8
  Top Layer w0.25: U2.34 33.072,38.787 33.528,39.243 39.243,39.243 40.259,38.227
  Top Layer w0.35: U5.1 27.559,20.295 40.259,32.995 40.259,38.227
COMP: C13.2 R3.2 U3.6 | length 5.1
  Top Layer w0.381: U3.6 35.554,76.647 38.026,76.647 38.227,76.446 40.506,76.446 R3.2@40.513,76.453
GND: C1.2 C2.1 C3.1 C4.1 C6.1 C7.1 C8.1 C9.1 C10.1 C11.1 C12.1 C13.1 C14.1 C15.1 C16.1 C17.1 C18.1 C19.1 C20.1 C21.1 C22.1 C23.1 C24.1 C25.1 C26.1 C27.2 C28.2 C29.1 C30.1 D1.2 D7.2 D8.2 J1.2 J1.3 J2.2 J2.3 P1.1 P3.1 P6.1 R4.1 R5.1 R6.1 R7.1 R8.1 R9.1 R10.2 R11.2 R13.1 R14.1 R15.1 R17.1 SW1.2 U1.5 U2.12 U2.18 U2.31 U2.47 U2.63 U3.7 U4.2 U5.2 VR1.1 | length 53.3
  Top Layer w0.25: v1(10.414,41.021) 10.922,41.021 C28.2 ; C27.2 v1(11.684,48.641) ; R17.1 v1(19.939,68.453) ; U2.12 20.293,40.295 21.499,40.295 v1(21.971,40.767) ; v1(22.778,38.055) 22.781,38.052 22.781,36.291 U2.18 ; U2.63 22.81,47.762 22.81,46.043 v1(22.869,45.983) ; v1(29.21,37.973) 29.26,37.923 29.26,36.312 U2.31 ; v1(30.099,45.339) 30.126,45.312 31.76,45.312 U2.47
  Top Layer w0.35: v1(7.874,48.641) 7.916,48.683 9.229,48.683 C17.1 ; v1(13.081,39.243) 13.716,39.878 C23.1 C23.1@14.561,39.903 ; C19.1 17.805,48.851 18.621,48.035 18.621,47.927 v1(18.669,47.879) ; SW1.2 v1(18.288,22.86) ; C29.1 21.566,65.234 21.649,65.151 v1(21.717,65.151) ; C16.1@22.781,49.526 C16.1 v1(23.876,49.53) ; U5.2 26.289,21.268 26.416,21.395 v1(26.416,21.463) ; v1(26.797,25.654) R14.1 ; v1(29.083,25.654) R15.1 ; R11.2 29.864,15.348 31.096,15.348 v1(31.115,15.367) ; R9.1 32.266,51.173 v1(32.296,51.143) ; C26.1 33.278,30.476 35.048,30.476 v1(35.052,30.48) ; v1(35.179,34.036) C20.1 ; C21.1 37.27,37.846 37.524,37.592 v1(37.592,37.592) ; v1(40.005,74.803) 40.867,74.803 42.517,76.453 C14.1 ; U4.2 v1(40.894,21.463) ; R6.1 v1(43.434,45.593) ; R10.2 v1(45.847,15.367) ; C18.1 47.855,44.66 47.938,44.577 v1(48.006,44.577)
  Top Layer w0.381: v1(7.239,60.31) 7.239,60.344 8.084,61.189 C30.1 C30.1@8.043,61.256 ; U1.5@7.854,63.021 7.967,63.135 7.967,63.534 U1.5@8.043,63.458 ; U1.5 v1(8.001,65.278) ; v1(8.636,56.642) R13.1 ; v1(26.924,75.184) 27.482,75.742 27.482,76.369 C11.1 ; v1(33.655,77.978) U3.7 U3.7@35.717,77.978 ; v1(36.703,77.343) 36.703,77.538 37.008,77.842 37.702,77.842 C13.1
  other v1: 14.986,7.62 14.986,8.636 14.986,9.652 14.986,10.668 41.529,53.467 42.799,53.467 22.606,55.118 22.606,58.039 31.115,59.563 32.131,59.563 33.147,59.563 19.431,70.739 20.574,70.739 21.717,70.739 22.86,70.739 33.782,70.993 34.925,70.993 36.068,70.993 0.762,74.168 0.762,75.184 0.762,80.518 0.762,81.407 29.845,82.423 52.07,84.074 37.084,84.201 44.45,84.201 29.845,85.598
LED1: D5.A U2.26 | length 4.2
  Top Layer w0.25: U2.26 26.797,36.275 26.797,34.671
  Top Layer w0.35: D5.A 26.797,34.671
LED2: D6.A U2.27 | length 4.9
  Top Layer w0.25: U2.27 27.285,35.199 27.94,34.544
  Top Layer w0.35: 27.94,34.544 29.083,33.401 D6.A
NetC12_2: C12.2 U3.4 | length 3.8
  Top Layer w0.381: U3.4 30.293,74.201 31.976,72.518 C12.2
NetC14_2: C14.2 R3.1 | length 2.4
  Top Layer w0.381: R3.1@40.513,78.233 C14.2 42.925,78.233 C14.2@42.926,78.232
NetC26_2: C26.2 U2.30 | length 6.8
  Top Layer w0.25: U2.30 28.785,35.35 30.353,33.782
  Top Layer w0.35: 30.353,33.782 32.123,32.012 C26.2
NetC27_1: C27.1 U2.5 Y1.2 | length 9.8
  Top Layer w0.25: Y1.2@14.924,46.565 Y1.2 ; 18.924,43.787 U2.5
  Top Layer w0.35: C27.1 Y1.2@14.924,46.565 ; Y1.2 15.761,45.852 16.858,45.852 18.924,43.787
NetC28_1: C28.1 U2.6 Y1.1 | length 9
  Top Layer w0.25: 18.409,43.287 U2.6
  Top Layer w0.35: C28.1 Y1.1@14.965,42.506 ; Y1.1 17,42.527 17.76,43.287 18.409,43.287
NetC30_2: C30.2 U1.6 | length 2.5
  Top Layer w0.3: C30.2 8.934,61.239 9.271,61.576 U1.6
NetD2_K: D2.K R7.2 | length 2.5
  Top Layer w0.381: D2.K 23.499,82.681 26.023,82.681 R7.2
NetD3_K: D3.K R8.2 | length 3.9
  Top Layer w0.35: D3.K 38.353,54.476 38.353,53.341 39.439,52.255 39.834,52.255 40.124,51.965 R8.2
NetD4_K: D4.K R9.2 | length 2.1
  Top Layer w0.35: D4.K 30.738,54.614 30.738,52.836 R9.2
NetD5_K: D5.K R14.2 | length 2.9
  Top Layer w0.35: R14.2 D5.K
NetD6_K: D6.K R15.2 | length 2.9
  Top Layer w0.35: R15.2 D6.K
NetR10_1: R10.1 U4.8 | length 2.3
  Top Layer w0.45: U4.8 42.178,14.531 44.436,14.531 R10.1
NetR11_1: R11.1 U5.8 | length 2.3
  Top Layer w0.45: U5.8 27.593,14.512 29.811,14.512 R11.1
NetR12_2: R12.2 U1.7 | length 4.9
  Top Layer w0.381: R12.2 10.432,58.718 10.541,58.828 U1.7
NetR16_1: R16.1 R17.2 U2.9 | length 54.4
  Top Layer w0.25: 19.05,41.656 19.181,41.787 U2.9
  Top Layer w0.35: R17.2 R16.1 14.605,68.453 12.065,65.913 7.493,65.913 6.35,64.77 6.35,40.767 9.017,38.1 16.891,38.1 18.796,40.005 18.796,41.402 19.05,41.656
NRST: C23.2 SW1.1 U2.7 | length 23.8
  Top Layer w0.25: C23.2 16.383,39.878 17.272,40.767 17.272,41.529 18.53,42.787 U2.7 20.291,42.793 21.838,42.793 v1(21.844,42.799)
  Top Layer w0.35: v1(17.653,31.877) 17.653,30.503 SW1.1
  Bottom Layer w0.35: v1(17.653,31.877) 17.653,33.782 22.733,38.862 22.733,41.91 v1(21.844,42.799)
PH: C5.1 D1.1 L1.1 U3.8
RX: P2.1 U2.17 | length 16.5
  Top Layer w0.25: 21.336,34.417 22.285,35.366 U2.17
  Top Layer w0.35: P2.1 19.558,32.639 21.336,34.417
SW_EN: R2.2 R4.2 U3.3 | length 8.9
  Top Layer w0.381: R4.2 26.698,72.518 R2.2 26.543,73.66 29.53,76.647 30.232,76.647 U3.3
TCK: P1.4 U2.49 | length 22.1
  Top Layer w0.25: U2.49 32.985,47.787 33.02,47.752
  Top Layer w0.35: 33.02,47.752 49.022,47.752 P1.4
TMS: P1.3 U2.46 | length 19.9
  Top Layer w0.25: U2.46 33.191,44.787
  Top Layer w0.35: 33.191,44.787 34.798,43.18 P1.3
TX: P2.2 U2.16 | length 13.7
  Top Layer w0.25: 18.288,38.1 18.475,38.287 U2.16
  Top Layer w0.35: P2.2 15.367,35.179 18.288,38.1
VCC3V3: C1.1 C4.2 C16.2 C17.2 C18.2 C19.2 C20.2 C21.2 C22.2 C24.2 C25.2 D4.A P1.2 U2.1 U2.13 U2.19 U2.32 U2.48 U2.64 U4.3 U5.3 VR1.2 | length 180
  Top Layer w0.25: 9.144,51.054 9.144,49.701 C17.2 15.577,49.574 19.364,45.787 U2.1 ; 16.637,50.8 16.656,50.8 17.755,49.701 C19.2 17.889,49.592 18.48,49.592 21.844,46.228 21.844,44.069 22.86,43.053 22.86,40.513 22.134,39.787 U2.13 ; C16.2 21.844,49.447 21.844,48.678 22.285,48.237 U2.64 ; U2.19 23.285,37.509 24.384,38.608 29.591,38.608 30.353,37.846 C21.2 ; U2.32 29.785,36.22 29.81,36.195 C20.2 ; U2.48 33.715,45.787 34.544,44.958
  Top Layer w0.45: 21.717,50.8 21.927,50.59 C16.2 ; U5.3 25.019,18.542 26.035,17.526 39.497,17.526 ; 33.655,56.261 39.116,50.8 49.911,50.8 53.086,47.625 53.086,44.45 ; 34.544,44.958 35.433,44.069 43.18,44.069 44.621,45.51 C18.2 46.557,45.585 47.482,45.585 47.49,45.593 48.387,45.593 49.53,44.45 53.086,44.45 ; C20.2 v1(37.592,36.195) ; C21.2 35.337,37.771 35.337,37.307 36.449,36.195 ; U4.3 39.624,17.653 39.497,17.526 ; v1(46.609,36.195) P1.2 53.086,42.672 ; 39.497,17.526 46.355,17.526 53.086,24.257 53.086,42.672 ; 53.086,42.672 53.086,44.45
  Bottom Layer w0.45: v1(37.592,36.195) v1(46.609,36.195)
VCC5VSW: C2.2 C3.2 C6.2 C7.2 C8.2 C15.2 C29.2 D3.A L1.2 R1.1 U1.8 VR1.3
VCC12V: C9.2 C10.2 C11.2 D2.A D7.1 D8.1 J1.1 P3.2 R2.1 R16.2 U1.1 U1.2 U3.2 | length 10.8
  Top Layer w0.35: 11.938,70.104 13.462,70.104 14.224,69.342 16.09,69.342 R16.2
  Top Layer w0.381: 24.892,75.438 24.892,72.136 26.339,70.689 26.747,70.689 R2.1@27.087,70.348
VCC12VOUT: J2.1 P6.2 U1.3 U1.4
VIOUT: R12.1 R13.2 U2.8 | length 38
  Top Layer w0.25: 18.796,42.164 18.919,42.287 U2.8
  Top Layer w0.3: R13.2@8.784,58.57 9.149,58.57 9.7,58.018 R12.1@10.264,58.018
  Top Layer w0.35: R12.1 10.414,56.896 9.525,56.007 7.62,56.007 6.858,55.245 6.858,40.934 9.184,38.608 16.637,38.608 18.288,40.259 18.288,41.656 18.796,42.164
VSENSE: R1.2 R5.2 U3.5 | length 8
  Top Layer w0.381: R5.2 R1.2@38.146,72.483 ; U3.5 36.703,75.438 38.481,73.66 R1.2
pads on no net: J1.MH1 J1.MH2 J2.MH1 J2.MH2 U2.2 U2.3 U2.4 U2.10 U2.11 U2.14 U2.15 U2.20 U2.21 U2.22 U2.23 U2.24 U2.25 U2.28 U2.29 U2.35 U2.36 U2.37 U2.38 U2.39 U2.40 U2.41 U2.42 U2.43 U2.50 U2.51 U2.52 U2.53 U2.54 U2.55 U2.56 U2.57 U2.58 U2.59 U2.61 U2.62 U4.5 U5.5

## Polygon pours and split planes (outlines as drawn)
GND on Bottom Layer "NONET_L-01_P-001" (solid, pour order 0): -1.27,87.63 -1.27,-1.397 55.88,-1.397 56.007,-1.524 56.007,87.376
GND on Top Layer "NONET_L-01_P-001" (solid, pour order 39): 41.021,51.308 41.021,55.499 49.911,55.499 49.911,53.975 43.307,53.975 43.307,51.308
VCC5VSW on Top Layer (solid, pour order 29): 36.83,55.753 49.657,55.753 49.657,63.627 40.386,63.627 40.386,70.358 36.83,70.358 36.83,67.691 14.605,67.691 12.827,65.913 11.176,64.262 11.176,62.484 13.843,62.484 13.843,64.262 15.24,65.659 36.83,65.659 36.83,65.278 26.924,65.278 26.924,63.5 36.83,63.5
VCC3V3 on Top Layer (solid, pour order 38): 7.239,50.419 17.526,50.419 29.718,50.419 29.718,55.753 36.449,55.753 36.449,57.404 24.765,57.404 24.765,51.562 17.526,51.562 17.526,59.944 25.019,59.944 25.019,61.087 29.845,61.087 29.845,62.992 25.019,62.992 25.019,64.262 14.224,64.262 14.224,55.499 7.239,55.499
VCC12V on Top Layer (solid, remove dead copper, pour order 26): 27.171,77.343 31.369,77.343 31.369,78.613 27.079,78.613 24.765,81.675 9.906,81.675 9.906,67.691 12.446,67.691 12.446,73.406 24.765,73.406
GND on Top Layer (solid, pour order 35): 17.907,51.816 24.511,51.816 24.511,57.785 36.576,57.785 36.576,62.992 30.861,62.992 30.861,60.579 26.543,60.579 25.654,59.69 17.907,59.69
GND on Top Layer "NONET_L-01_P-001" (solid, pour order 30): 6.096,25.273 6.096,20.32 10.287,20.32 10.287,3.937 15.621,3.937 15.621,25.273
VCC12VOUT on Top Layer "NONET_L-01_P-001" (solid, pour order 27): 9.779,67.691 9.779,70.231 0.508,70.231 0.508,-1.397 5.969,-1.397 5.969,66.294 7.366,67.691
GND on Top Layer "NONET_L-01_P-001" (solid, pour order 24): 15.113,70.104 15.113,73.152 24.384,73.152 24.384,70.104
GND on Top Layer "Top Layer-GND" (solid, pour order 6): -0.635,72.39 4.445,72.39 4.445,81.915 54.483,81.915 54.483,87.503 -0.635,87.503
GND on Top Layer "NONET_L-01_P-001" (solid, pour order 10): 27.94,71.628 27.94,69.469 33.274,69.469 33.274,67.945 36.576,67.945 36.576,71.628
PH on Top Layer (solid, pour order 9): 33.528,78.613 36.703,78.613 36.703,79.502 43.942,79.502 43.942,69.85 50.292,69.85 50.292,80.01 50.292,82.296 33.528,82.296

## Silkscreen, mask and mechanical layers (free items; w line width, h text height)
Top Overlay:
  text "5VLED" at 35.306,57.785 h0.8
  text "3.3LED" at 28.448,56.134 h0.8
  text "By: E. Peterson for QFSAE" at 50.654,5.334 h1.2 r90
  text "PMBoard + Mock ECU V00.00" at 16.383,1.778 h1.2